# Altium PCB dc-dc stepup converter.PcbDoc
Units mm, origin at the board's own origin, x right, y up, seen from the top; angles counter-clockwise.
Board outline 60.96 x 43.18 mm, 2 copper layers (Top Layer, Bottom Layer); 20 components, 10 nets, 50 pads, 4 vias.
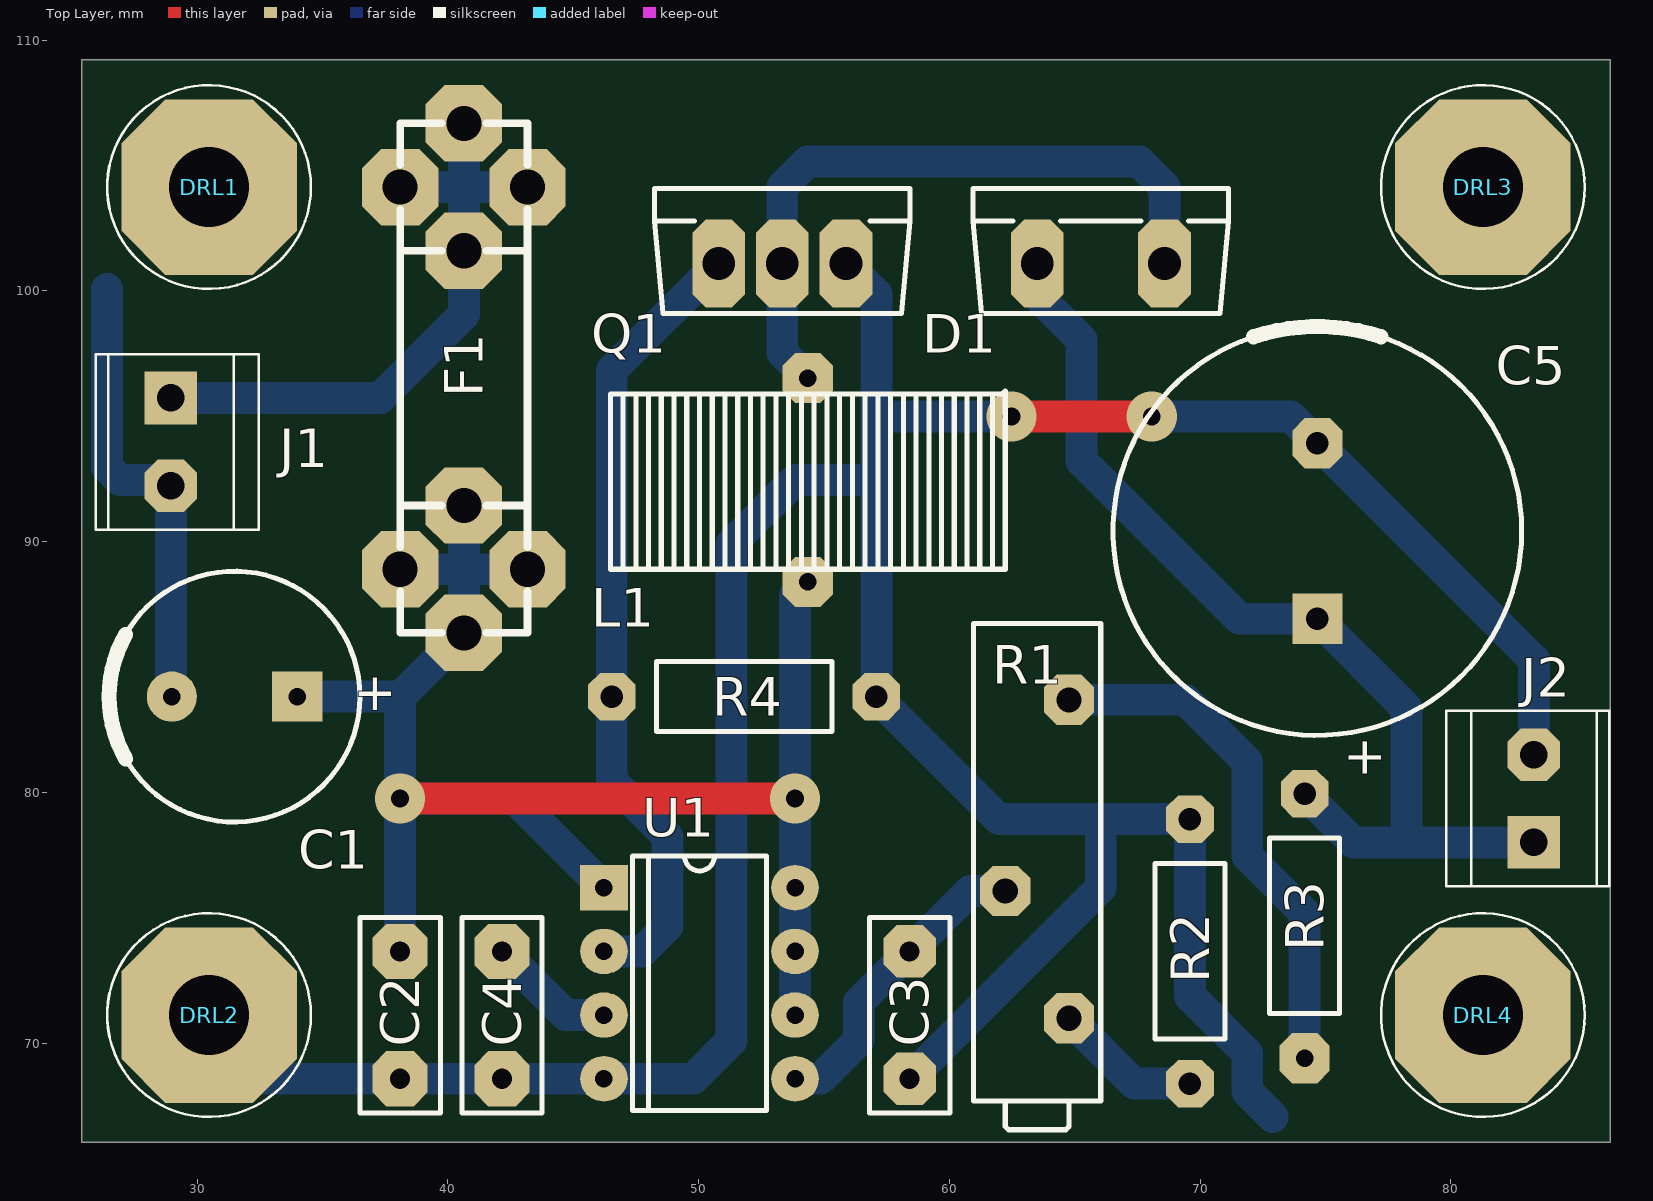
[diagram p0: Top Layer view]
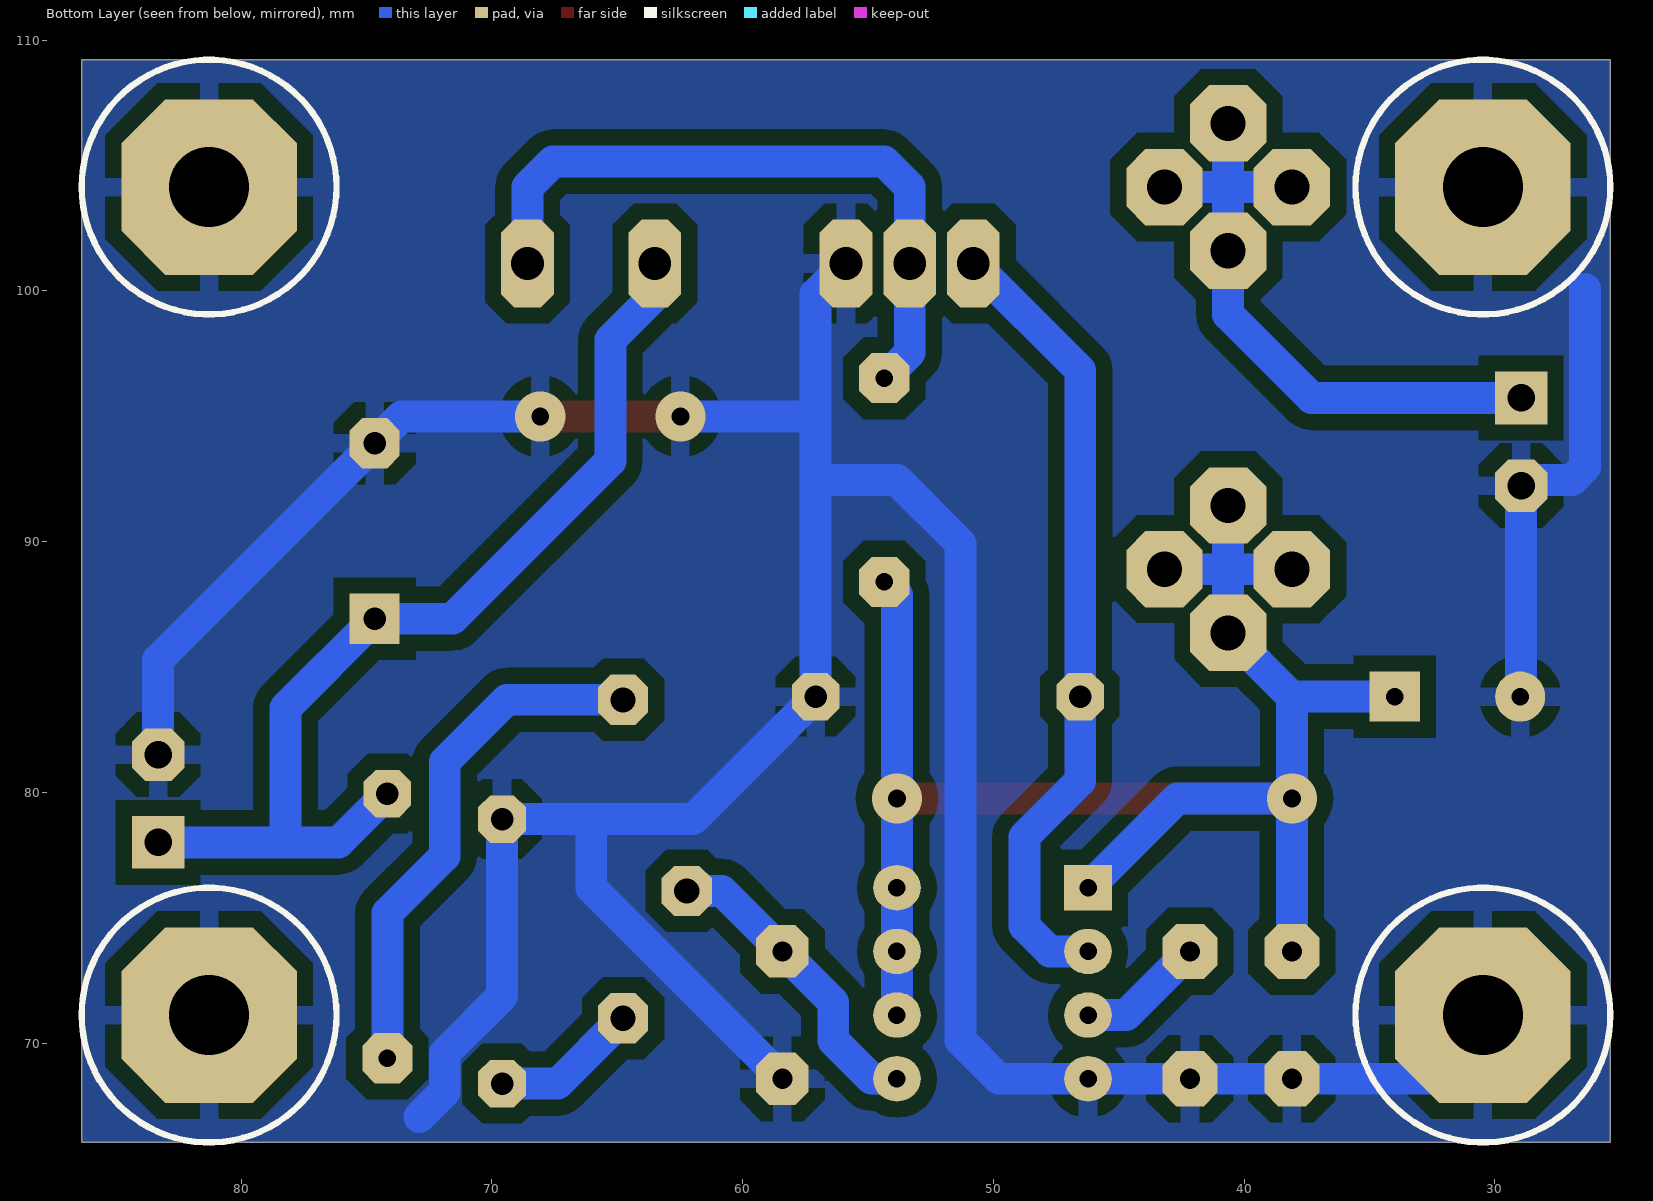
[diagram p1: Bottom Layer view, seen from below]

## Layer stack, top to bottom
Top Solder: solder mask 0.0102, Solder Resist, Dk 3.5
Top Layer: signal copper 0.0356
Dielectric1: dielectric 0.32, FR-4, Dk 4.8
Bottom Layer: signal copper 0.0356
Bottom Solder: solder mask 0.0102, Solder Resist, Dk 3.5

## Board outline
25.4,109.22 25.4,66.04 86.36,66.04 86.36,109.22 25.4,109.22

## Design rules (kind name [scope] priority, off if disabled: settings)
Clearance [All] p1: gap=0.635
FabricationTestPointUsage TestPointUsage [All] p1: valid=0 allowmultiple=FALSE
FabricationTestpoint Testpoint [All] p1: side=3 testpointundercomponent=TRUE minsize=1.016 maxsize=2.54 preferedsize=1.524 minholesize=0 maxholesize=1.016 preferedholesize=0.813 testpointgrid=0.025 allowsidetop=TRUE allowsidebottom=TRUE usegrid=TRUE gridtolerance=0
PolygonConnect [All] p1: connectstyle=Relief reliefconductorwidth=0.762 reliefentries=4 polygonreliefangle="90 Angle" airgapwidth=0.254
RoomDefinition "dc-dc stepup converter" [InComponentClass('dc-dc stepup converter')] p1: confinementstyle=ConfineIn formatcopy=TRUE lockcomponents=FALSE outline 0,0 50.8,0 50.8,25.4 0,25.4
RoutingVias [All] p1: holewidth=0.8 width=1.9 viastyle="Through Hole" minholewidth=0.711 minwidth=1.27 maxholewidth=1 maxwidth=2
SolderMaskExpansion [All] p1: expansion=0.102
Width [All] p1: maxlimit=2.54 minlimit=0.508 preferedwidth=0.762
28 further rules are at their usual default settings.

## Components (designator, comment, footprint, x,y, rotation, side; value= is the part's Value field where it differs from the comment)
C1 "1000uF / 25V" CAPPR5-10x20_MANUAL 31.496,83.82 r180 top
C2 "100nF" CAPR5.08-7.8X3.2_MANUAL#1 38.1,71.12 r90 top
C3 "100nF" CAPR5.08-7.8X3.2_MANUAL#2 58.42,71.12 r90 top
C4 "1nF" CAPR5.08-7.8X3.2_MANUAL#1 42.164,71.12 r90 top
C5 "47uF / 400V" CAPPR7.5-16.5x30_MANUAL 74.676,90.424 r90 top
D1 "BYV29 / 400V" TO220/2 66.04,101.092 r0 top
DRL1 "SCREW DRILL" "3mm screw drill I" 30.48,104.14 r0 top
DRL2 "SCREW DRILL" "3mm screw drill I" 30.48,71.12 r0 top
DRL3 "SCREW DRILL" "3mm screw drill I" 81.28,104.14 r0 top
DRL4 "SCREW DRILL" "3mm screw drill I" 81.28,71.12 r0 top
F1 "" "Bezp 5x20 uniw" 40.64,96.52 r270 top
J1 "ARK2_power" "ARK2/3.5mm pitch" 28.956,93.98 r270 top
J2 "ARK2_power" "ARK2/3.5mm pitch" 83.312,79.756 r90 top
L1 "330uH / 3A" IND_15.4_PIONOWO 54.356,92.456 r90 top
Q1 "IRF840" TO220 53.34,101.092 r0 top
R1 "2k2" RPot_wieloob_19mm_lezacy 63.5,77.216 r0 top
R2 "4k7" RES10.55-7X2.8_MANUAL#1 69.596,73.66 r270 top
R3 "680k" RES10.55-7X2.8_MANUAL#2 74.168,74.676 r90 top
R4 "330" RES10.55-7X2.8_MANUAL#1 51.816,83.82 r180 top
U1 "MC34063" DIP8_MANUAL 46.228,76.2 r0 top

## Footprints (in the part's own frame and the unit in brackets; to place one, negate y for a bottom-side part, rotate by r counter-clockwise, add the part's x,y. Pads: shape width x height; smd on the part's side, far side on the other; paste and mask are expansions set on the pad)
"3mm screw drill I" [mm]
  oct 7x7 hole 3.2: 0(0,0)
  silkscreen extent -4.06,-4.06 4.06,4.06
"ARK2/3.5mm pitch" [mm]
  rect 2.1x2.1 hole 1.1: 1(-1.75,0)
  oct 2.1x2.1 hole 1.1: 2(1.75,0)
  silkscreen extent -3.5,-3 3.5,3.5
"Bezp 5x20 uniw" [mil]
  oct 120x120 hole 55.12: 1(-300,100) 2(300,100) 3(-400,0) 4(200,0) 5(-200,0) 6(400,0) 7(-300,-100) 8(300,-100)
  silkscreen extent -400,-100 400,100
CAPPR5-10x20_MANUAL [mm]
  rect 2x2 hole 0.7: 1(-2.5,0)
  round 2 hole 0.7: 2(2.5,0)
  silkscreen extent -5,-5 5,5
CAPPR7.5-16.5x30_MANUAL [mm]
  rect 2x2 hole 0.9: 1(-3.5,0)
  oct 2x2 hole 0.9: 2(3.5,0)
  silkscreen extent -8.15,-8.15 8.15,8.15
CAPR5.08-7.8X3.2_MANUAL#1 [mm]
  oct 2.2x2.2 hole 0.8: 1(-2.54,0) 2(2.54,0)
  silkscreen extent -3.9,-1.6 3.9,1.6
CAPR5.08-7.8X3.2_MANUAL#2 [mm]
  oct 2.1x2.1 hole 0.8: 1(-2.54,0) 2(2.54,0)
  silkscreen extent -3.9,-1.6 3.9,1.6
DIP8_MANUAL [mm]
  rect 1.9x1.8 hole 0.7: 1(0,0)
  oval 1.9x1.8 hole 0.7: 2(0,-2.54) 3(0,-5.08) 4(0,-7.62) 5(7.62,-7.62) 6(7.62,-5.08) 7(7.62,-2.54) 8(7.62,0)
  silkscreen extent 1.14,-8.89 6.48,1.27
IND_15.4_PIONOWO [mm]
  oct 2x2 hole 0.7: 1(-4.064,0) 2(4.064,0)
  silkscreen extent -3.56,-7.87 3.56,7.87
RES10.55-7X2.8_MANUAL#1 [mm] "Resistor, Axial; Body 7 x 2.8 mm (LxDia. max), Lead Dia. 0.65 mm (max)"
  oct 1.9x1.9 hole 0.9: 1(-5.275,0) 2(5.275,0)
  silkscreen extent -3.5,-1.4 3.5,1.4
RES10.55-7X2.8_MANUAL#2 [mm] "Resistor, Axial; Body 7 x 2.8 mm (LxDia. max), Lead Dia. 0.65 mm (max)"
  oct 2x2 hole 0.7: 1(-5.275,0)
  oct 1.9x1.9 hole 0.9: 2(5.275,0)
  silkscreen extent -3.5,-1.4 3.5,1.4
RPot_wieloob_19mm_lezacy [mm]
  oct 2x2 hole 1: 1(1.27,-6.223) 2(1.27,6.477) 3(-1.27,-1.143)
  silkscreen extent -2.54,-10.67 2.54,9.53
TO220 [mm]
  oct 2.1x3.5 hole 1.3: 1(-2.54,0) 2(0,0) 3(2.54,0)
  silkscreen extent -5.1,-2 5.1,3
TO220/2 [mm]
  oct 2.1x3.5 hole 1.3: 1(-2.54,0) 2(2.54,0)
  silkscreen extent -5.1,-2 5.1,3

## Part data
C1 C5: library part "Cap Pol", "Polarized Capacitor"
C2 C3 C4: library part Cap, "Capacitor"
D1: library part BYV29, "Rectifier diodes ultrafast"
DRL1 DRL2 DRL3 DRL4: "Screw Drill"
F1: library part Fuse, "Fuse"
L1: library part InducCore, "Magnetic-Core Inductor with Winding Polarity Marking"
Q1: "N-Channel Power MOSFET"
R1: library part RPot, "Potentiometer"
R2 R3 R4: library part Res, "Resistor"
U1: "DC-to-DC Converter Control Circuit"

## Via types
v1: diameter 2, hole 0.711, Top Layer to Bottom Layer, 4 vias

## Nets (pads, with @x,y where several pads share a name; then routed paths per layer and width w, separated by ;. In a path a pad name is that pad's centre, name@x,y a point inside that pad or via, vN(x,y) a via of type N, cw(c..) or ccw(c..) an arc to the next point about the centre after c; other vN are vias at no path point)
GND: C1.2 C2.1 C3.1 C4.1 C5.2 DRL1.0 DRL2.0 DRL3.0 DRL4.0 J1.2 J2.2 Q1.3 R2.1 R4.1 U1.4 | length 163.3
  Top Layer w1.27: v1(62.484,94.996) v1(68.072,94.996)
  Bottom Layer w1.27: 26.416,100.076 26.416,92.964 26.924,92.456 28.73,92.456 J1.2 28.956,83.86 C1.2 ; DRL2.0@28.996,72.096 32.512,68.58 C2.1 C4.1 U1.4 49.784,68.58 51.308,70.104 51.308,89.916 53.848,92.456 57.091,92.456 ; Q1.3 57.091,99.881 57.091,94.996 ; C3.1 66.04,76.2 66.04,78.935 ; v1(62.484,94.996) 57.091,94.996 ; v1(68.072,94.996) 73.604,94.996 C5.2 83.312,85.288 J2.2 ; R2.1@68.775,78.935 R2.1 ; 72.898,67.056 71.882,68.072 71.882,69.596 69.596,71.882 R2.1 ; 57.091,92.456 57.091,94.996 ; 57.091,92.456 R4.1 61.976,78.935 66.04,78.935 ; 66.04,78.935 R2.1
NetC1_1: C1.1 C2.2 F1.2 F1.4 F1.6 F1.8 L1.1 U1.1 U1.6 U1.7 U1.8 | length 70.8
  Top Layer w1.27: v1(38.1,79.756) v1(53.848,79.756)
  Bottom Layer w1.27: C1.1 38.1,83.82 ; C2.2 v1(38.1,79.756) ; F1.8 40.64,88.9 ; F1.4 40.64,88.9 ; F1.2 40.64,88.9 ; U1.1 42.672,79.756 v1(38.1,79.756) ; U1.6 U1.7 U1.8 v1(53.848,79.756) 53.848,87.884 L1.1 ; v1(38.1,79.756) 38.1,83.82 ; 38.1,83.82 F1.6 40.64,88.9
NetC3_2: C3.2 R1.3 U1.5 | length 12.4
  Bottom Layer w1.27: U1.5 54.864,68.58 56.388,70.104 56.388,71.628 C3.2 60.833,76.073 R1.3
NetC4_2: C4.2 U1.3 | length 5.1
  Bottom Layer w1.27: C4.2 44.704,71.12 U1.3
NetC5_1: C5.1 D1.1 J2.1 R3.2 | length 41
  Bottom Layer w1.27: D1.1 63.5,99.822 65.278,98.044 65.278,93.218 71.572,86.924 C5.1 78.232,83.368 78.232,78.006 ; R3.2 76.113,78.006 78.232,78.006 ; J2.1 78.232,78.006
NetD1_1: D1.2 L1.2 Q1.2 | length 27.2
  Bottom Layer w1.27: L1.2 53.34,97.536 Q1.2 53.34,104.14 54.356,105.156 67.564,105.156 68.58,104.14 D1.2
NetF1_1: F1.1 F1.3 F1.5 F1.7 J1.1 | length 25.8
  Bottom Layer w1.27: J1.1 37.31,95.73 40.64,99.06 F1.5 40.64,104.14 ; F1.7 40.64,104.14 ; F1.3 40.64,104.14 ; F1.1 40.64,104.14
NetQ1_1: Q1.1 R4.2 U1.2 | length 31.8
  Bottom Layer w1.27: U1.2 47.752,73.66 48.768,74.676 48.768,78.232 46.736,80.264 ; 46.541,80.459 R4.2 46.541,96.833 Q1.1
NetR1_1: R1.1 R2.2 | length 5.9
  Bottom Layer w1.27: R1.1 67.378,68.385 R2.2
NetR1_2: R1.2 R3.1 | length 20.9
  Bottom Layer w1.27: R1.2 69.41,83.693 71.882,81.221 71.882,77.47 74.168,75.184 R3.1

## Polygon pours and split planes (outlines as drawn)
GND on Bottom Layer "Bottom GND Polygon" (solid, pour order 1000): 25.4,109.22 25.4,66.04 86.36,66.04 86.36,109.22 25.4,109.22

## Text inside footprints (layer, text, board x,y; h text height)
C1: Top Overlay "+" at 37.971,84.57 h1.5 r180
C5: Top Overlay "+" at 77.216,80.518 h1.5 r90